# Altium PCB PCB_2xOPN2C-L MegaMod_2021-11-12.pcbdoc
Units mil, origin at the board's own origin, x right, y up, seen from the top; angles counter-clockwise.
Board outline 5110 x 4310 mil, 2 copper layers (Top Layer, Bottom Layer); 51 components, 62 nets, 234 pads, 27 vias.
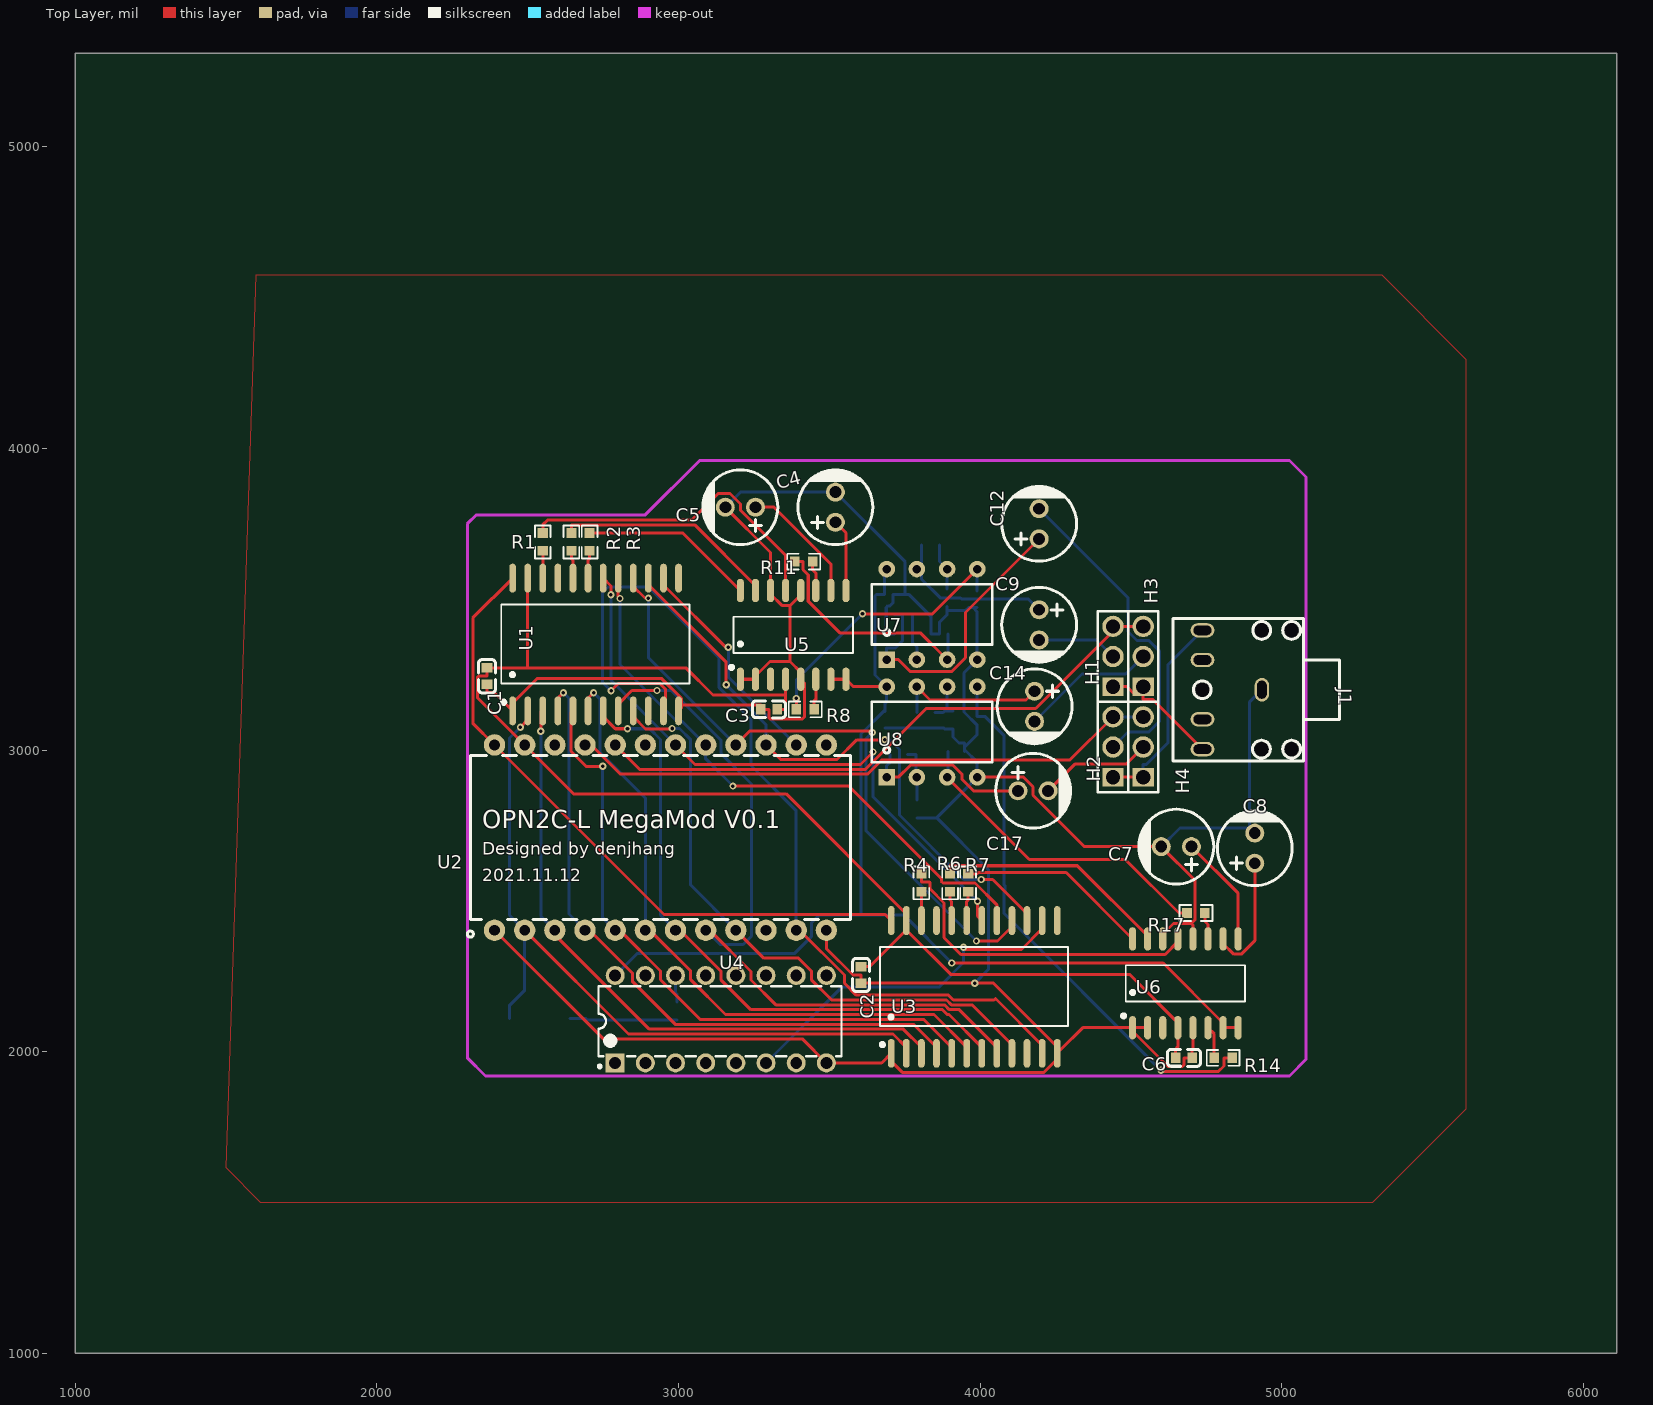
[diagram p0: Top Layer view]
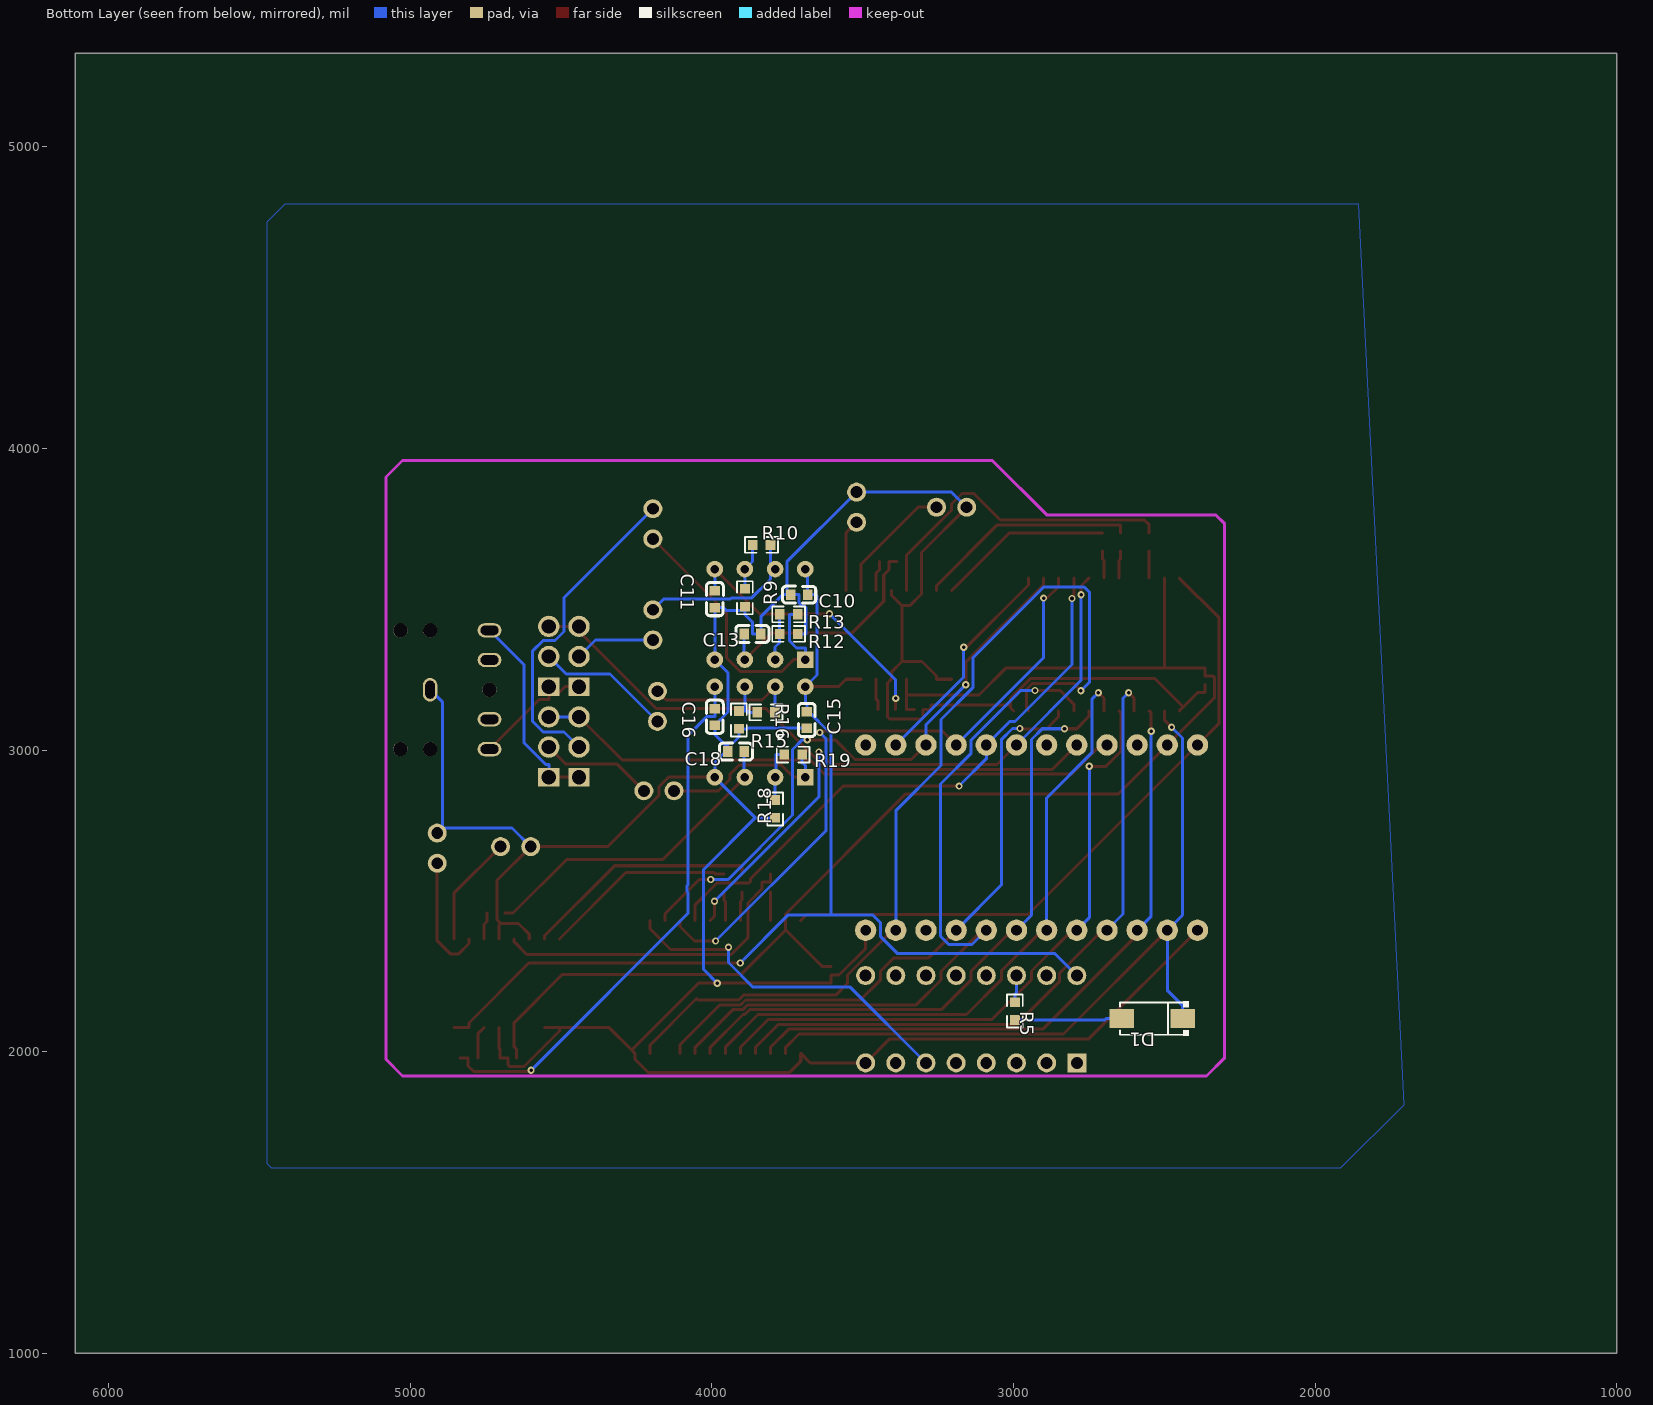
[diagram p1: Bottom Layer view, seen from below]

## Layer stack, top to bottom
Top Layer: signal copper (thickness not stored)
Dielectric: dielectric 12.6, FR-4, Dk 4.8
Bottom Layer: signal copper (thickness not stored)

## Board outline
6110,1000 1000,1000 1000,5310 6110,5310

## Components (designator, comment, footprint, x,y, rotation, side; value= is the part's Value field where it differs from the comment)
C1 "0.1u" C0603#1 2365,3245 r90 top
C2 "0.1u" C0603#1 3605,2255 r90 top
C3 "0.1u" C0603#1 3300,3135 r0 top
C4 "47u" CAP-TH_BD6.3-P2.50-D1.0-FD 3520,3805 r90 top
C5 "47u" CAP-TH_BD6.3-P2.50-D1.0-FD 3205,3805 r180 top
C6 "0.1u" C0603#1 4675,1980 r180 top
C7 "47u" CAP-TH_BD6.3-P2.50-D1.0-FD 4650,2680 r180 top
C8 "47u" CAP-TH_BD6.3-P2.50-D1.0-FD 4910,2675 r90 top
C9 "10uF" CAP-TH_BD6.3-P2.50-D1.0-FD 4195,3415 r270 top
C10 "0.1u" C0603#2 3710,3515 r0 bottom
C11 "1.5n" C0603#2 3990,3500 r90 bottom
C12 "10uF" CAP-TH_BD6.3-P2.50-D1.0-FD 4195,3750 r90 top
C13 "1.5n" C0603#2 3865,3385 r0 bottom
C14 "10uF" CAP-TH_BD6.3-P2.50-D1.0-FD 4180,3145 r270 top
C15 "0.1u" C0603#2 3685,3100 r270 bottom
C16 "1.5n" C0603#2 3990,3110 r90 bottom
C17 "10uF" CAP-TH_BD6.3-P2.50-D1.0-FD 4175,2865 r0 top
C18 "1.5n" C0603#2 3920,2995 r180 bottom
D1 "SS14" SMA_L4.4-W2.8-LS5.4-RD 2540,2110 r180 bottom
H1 "Header-Male-2.54_1x3" HDR-TH_3P-P2.54-V-M-1 4440,3310 r90 top
H2 "Header-Male-2.54_1x3" HDR-TH_3P-P2.54-V-M-1 4440,3010 r90 top
H3 "Header-Male-2.54_1x3" HDR-TH_3P-P2.54-V-M-1 4540,3310 r90 top
H4 "Header-Male-2.54_1x3" HDR-TH_3P-P2.54-V-M-1 4540,3010 r90 top
J1 "PJ-307C" AUDIO-TH_PJ307C 4835,3200 r270 top
R1 "10r" R0603#1 2550,3690 r90 top
R2 "10r" R0603#1 2645,3690 r90 top
R3 "10r" R0603#1 2705,3690 r90 top
R4 "10r" R0603#1 3805,2560 r90 top
R5 "1k" R0603#2 2995,2135 r90 bottom
R6 "10r" R0603#1 3900,2560 r90 top
R7 "10r" R0603#1 3960,2560 r90 top
R8 "7.5k" R0603#1 3420,3135 r180 top
R9 "10k" R0603#2 3890,3505 r270 bottom
R10 "4.7k" R0603#2 3835,3680 r0 bottom
R11 "7.5k" R0603#1 3415,3625 r180 top
R12 "10k" R0603#2 3745,3385 r180 bottom
R13 "4.7k" R0603#2 3745,3450 r0 bottom
R14 "7.5k" R0603#1 4805,1980 r0 top
R15 "10k" R0603#2 3910,3100 r270 bottom
R16 "4.7k" R0603#2 3820,3125 r0 bottom
R17 "7.5k" R0603#1 4715,2460 r180 top
R18 "10k" R0603#2 3790,2805 r270 bottom
R19 "4.7k" R0603#2 3730,2985 r0 bottom
U1 "YMF276-M" SOIC24-YMF276 2700,3370 r0 top
U2 "MegaGRRL IC-FM" DIP-24_L32.0-W13.8-P2.54-LS15.6-BL 2940,2710 r0 top
U3 "YMF276-M" SOIC24-YMF276 3955,2235 r0 top
U4 "MegaGRRL IC-DCSG" DIP-16_L20.4-W5.8-P2.54-LS7.6-BL 3139.96,2107.99 r0 top
U5 "μPD6376GS" SOIC16-UPD6376 3380,3395 r0 top
U6 "μPD6376GS" SOIC16-UPD6376 4680,2240 r0 top
U7 "SA5532P" DIP8 3840,3450 r0 top
U8 "SA5532P" DIP8 3840,3060 r0 top

## Footprints (in the part's own frame and the unit in brackets; to place one, negate y for a bottom-side part, rotate by r counter-clockwise, add the part's x,y. Pads: shape width x height; smd on the part's side, far side on the other; paste and mask are expansions set on the pad)
AUDIO-TH_PJ307C [mm]
  oval 2x1.2 hole 0.8 slot 1.5 at 0 deg: 1(0,2.5)
  oval 1.2x2 hole 0.8 slot 1.5 at 90 deg: 2(5,-2.5) 3(2.489,-2.5) 4(-2.511,-2.5) 5(-5,-2.5)
  round 1.2 hole 1.2 unplated: ""(-5,2.5) ""(-5,5) ""(0,-2.5) ""(5,2.5) ""(5,5)
  silkscreen extent -6.01,-4.99 5.99,9.03
C0603#1 [mm]
  rect 0.8x0.9 smd: 1(-0.7,0) 2(0.7,0)
  silkscreen extent -1.41,-0.71 1.39,0.72
C0603#2 [mm]
  rect 0.8x0.9 smd: 1(0.7,0) 2(-0.7,0)
  silkscreen extent -1.39,-0.72 1.41,0.71
CAP-TH_BD6.3-P2.50-D1.0-FD [mm]
  round 1.6 hole 1: 1(-1.27,0) 2(1.27,0)
  silkscreen extent -3.15,-3.15 3.17,3.15
DIP8 [mil]
  rect 55x55 hole 28: 1(-150,-150)
  round 55 hole 28: 2(-50,-150) 3(50,-150) 4(150,-150) 5(150,150) 6(50,150) 7(-50,150) 8(-150,150)
  silkscreen extent -200,-100 200,100
DIP-16_L20.4-W5.8-P2.54-LS7.6-BL [mm]
  rect 1.6x1.6 hole 1: 1(-8.89,-3.68)
  round 1.6 hole 1: 2(-6.35,-3.68) 3(-3.81,-3.68) 4(-1.27,-3.68) 5(1.27,-3.68) 6(3.81,-3.68) 7(6.35,-3.68) 8(8.89,-3.68) 9(8.89,3.68) 10(6.35,3.68) 11(3.81,3.68) 12(1.27,3.68) 13(-1.27,3.68) 14(-3.81,3.68) 15(-6.35,3.68) 16(-8.89,3.68)
  silkscreen extent -10.31,-4.1 10.16,2.77
DIP-24_L32.0-W13.8-P2.54-LS15.6-BL [mm]
  round 1.8 hole 0.9: 1(-13.97,-7.8) 2(-11.43,-7.8) 3(-8.89,-7.8) 4(-6.35,-7.8) 5(-3.81,-7.8) 6(-1.27,-7.8) 7(1.27,-7.8) 8(3.81,-7.8) 9(6.35,-7.8) 10(8.89,-7.8) 11(11.43,-7.8) 12(13.97,-7.8) 13(13.97,7.8) 14(11.43,7.8) 15(8.89,7.8) 16(6.35,7.8) 17(3.81,7.8) 18(1.27,7.8) 19(-1.27,7.8) 20(-3.81,7.8) 21(-6.35,7.8) 22(-8.89,7.8) 23(-11.43,7.8) 24(-13.97,7.8)
  silkscreen extent -16.26,-8.38 16,6.9
HDR-TH_3P-P2.54-V-M-1 [mm]
  rect 1.575x1.8 hole 1.2: 1(-2.54,0)
  round 1.8 hole 1.2: 2(0,0) 3(2.54,0)
  silkscreen extent -3.81,-1.27 3.81,1.27
R0603#1 [mil]
  rect 31.75x34.02 smd: 1(-29.66,0) 2(29.66,0)
  silkscreen extent -55,-26 55,26
R0603#2 [mil]
  rect 31.75x34.02 smd: 1(29.66,0) 2(-29.66,0)
  silkscreen extent -55,-26 55,26
SMA_L4.4-W2.8-LS5.4-RD [mm]
  rect 2.046x1.62 smd: 1(2.566,0) 2(-2.565,0)
  silkscreen extent -2.7,-1.44 3.08,1.44
SOIC16-UPD6376 [mil]
  oval 23.7x77.6 smd: 1(-175.12,-160.19) 2(-125.12,-160.19) 3(-75.12,-160.19) 4(-25.12,-160.19) 5(24.88,-160.19) 6(74.88,-160.19) 7(124.88,-160.19) 8(174.88,-160.19) 9(174.88,133.97) 10(124.88,133.97) 11(74.88,133.97) 12(24.88,133.97) 13(-25.12,133.97) 14(-75.12,133.97) 15(-125.12,133.97) 16(-175.12,133.97)
  silkscreen extent -211,-127 198,47
SOIC24-YMF276 [mil]
  oval 22.05x95.74 smd: 1(-250,-240) 2(-200,-240) 3(-150,-240) 4(-100,-240) 5(-50,-240) 6(0,-240) 7(50,-240) 8(100,-240) 9(150,-240) 10(200,-240) 11(250,-240) 12(300,-240) 13(300,200) 14(250,200) 15(200,200) 16(150,200) 17(100,200) 18(50,200) 19(0,200) 20(-50,200) 21(-100,200) 22(-150,200) 23(-200,200) 24(-250,200)
  silkscreen extent -288,-217 336,112

## Via types
v1: diameter 24.02, hole 12.01, Top Layer to Bottom Layer, 27 vias

## Nets (pads, with @x,y where several pads share a name; then routed paths per layer and width w, separated by ;. In a path a pad name is that pad's centre, name@x,y a point inside that pad or via, vN(x,y) a via of type N, cw(c..) or ccw(c..) an arc to the next point about the centre after c; other vN are vias at no path point)
/CS1: U1.14 U2.14 | length 740.2
  Top Layer w10: U1.14 2950,3547.01 3156.38,3340.63 v1(3165.03,3340.63)
  Bottom Layer w10: v1(3165.03,3340.63) 3165.03,3242.06 U2.14
/CS2: U3.14 U4.6 | length 1162.6
  Top Layer w10: v1(3944.36,2346.36) 3951.94,2338.78 4136.39,2338.78 4205,2407.39 U3.14
  Bottom Layer w10: U4.6 3541.2,2214.35 3863.01,2214.35 3944.36,2295.7 v1(3944.36,2346.36)
/IC: U1.11 U2.11 U3.11 | length 3129.4
  Top Layer w10: v1(2776.36,3196.43) 2800.37,3220.44 2937.99,3220.44 2956.67,3201.76 2956.67,3136.67 U1.11 ; U2.11 3401.03,2402.91 3549.67,2254.27 3549.67,2227.43 3589.34,2187.76 3894.54,2187.76 3910.63,2171.67 4045.95,2171.67 4050.66,2176.38 4205,2022.04 U3.11
  Bottom Layer w10: v1(2776.36,3196.43) 2748.22,3224.57 2748.22,3523.24 2765.34,3540.36 2899.46,3540.36 3134.76,3305.06 3134.76,3206.7 3240,3101.46 3240,2948.91 3390,2798.91 U2.11
/RD: U1.16 U2.16 U3.16 | length 2183.2
  Top Layer w10: U1.16 2850,3542.24 2888.45,3503.79 v1(2900,3503.79) ; U2.16 3236.55,3063.64 3636.4,3063.64 v1(3641.93,3058.11) ; v1(3987.28,2367) 4057.05,2367 4105,2414.95 U3.16
  Bottom Layer w10: v1(2900,3503.79) 2900,3307.09 U2.16 ; v1(3641.93,3058.11) 3620.87,3037.05 3620.87,2733.41 v1(3987.28,2367)
/WR: U1.15 U2.15 U3.15 | length 2015
  Top Layer w10: U1.15 2900,3549.04 3157.84,3291.2 v1(3157.84,3216.25) ; U2.15 3338.56,2968.53 3525.31,2968.53 3590.9,3034.12 v1(3683.67,3034.12) ; v1(4003.6,2571.17) 4040.95,2571.17 4155,2457.12 U3.15
  Bottom Layer w10: v1(3157.84,3216.25) 3290,3084.09 U2.15 ; v1(3683.67,3034.12) 3699.76,3034.12 3732.2,3001.68 3732.2,2784.61 3945.64,2571.17 v1(4003.6,2571.17)
A0: U1.17 U2.17 U3.17 | length 1951.9
  Top Layer w10: U1.17 2800,3508.3 v1(2806.02,3502.28) ; v1(3180.16,2880.74) 3564.23,2880.74 3870.88,2574.09 3870.88,2565.63 3876.74,2559.77 3982.36,2559.77 4055,2487.13 U3.17
  Bottom Layer w10: v1(2806.02,3502.28) 2806.02,3283.68 2994.98,3094.72 3012.37,3094.72 U2.17 3090,2970.9 v1(3180.16,2880.74)
A1: U1.18 U2.18 U3.18 | length 2059.3
  Top Layer w10: U1.18 2775.83,3544.17 v1(2775.83,3514.7) ; U2.18 3054.65,2952.44 3603.21,2952.44 v1(3644.75,2993.98) ; v1(3990.74,2498.93) 3990.74,2449.26 U3.18
  Bottom Layer w10: v1(2775.83,3514.7) 2775.83,3231.26 U2.18 ; v1(3644.75,2993.98) 3644.76,2844.91 v1(3990.74,2498.93)
A.VCC: C10.2 C15.2 U4.16 U5.7 U5.8 U6.7 U6.8 U7.8 U8.8 | length 3769.6
  Top Layer w10: U5.7 U5.8 3579.68,3210 U8.8 ; v1(3905.76,2294.31) 4606.11,2294.31 4804.88,2095.54 U6.7 U6.8
  Bottom Layer w10: U4.16 2862.21,2325.12 3383.71,2325.12 3440,2381.41 3440,2426.7 3467.16,2453.86 3604.78,2453.86 ; C15.2 C15.2@3685,3133.74 ; U7.8 3682.44,3592.44 C10.2 3655.62,3515 3651.42,3510.8 3651.42,3248.58 U8.8 3690,3159.38 3685,3154.38 C15.2@3685,3133.74 ; v1(3905.76,2294.31) 3746.21,2453.86 3604.78,2453.86 ; 3604.78,2453.86 3604.78,3053.6 3684.92,3133.74 C15.2@3685,3133.74
BCO1: R3.2 U5.16 | length 578.9
  Top Layer w10: R3.2 3014.2,3719.66 U5.16
BCO2: R7.2 U6.16 | length 638
  Top Layer w10: R7.2 3988.08,2589.66 3992.67,2594.25 4284.61,2594.25 U6.16
C4_1: C4.1 U5.9 | length 240.5
  Top Layer w10: C4.1 3554.88,3720.12 U5.9
C5_1: C5.1 U5.10 | length 415.7
  Top Layer w10: C5.1 3316.7,3805 3504.88,3616.82 U5.10
C9_1: C9.1 R10.2 U7.7 | length 579.9
  Bottom Layer w10: U7.7 3805.34,3615.34 3805.34,3628.42 ; R10.2 3805.34,3628.42 ; C9.1 4159.27,3500.73 3937.82,3500.73 3935.21,3503.34 3868.61,3503.34 3805.34,3566.61 3805.34,3628.42
C9_2: C9.2 H1.2 | length 267.8
  Bottom Layer w10: C9.2 4385,3365 H1.2
C12_1: C12.1 R13.2 U7.1 | length 1006.6
  Top Layer w10: U7.1 3728.57,3300 3767.86,3260.71 3905.68,3260.71 3951.3,3306.33 3951.3,3456.3 C12.1
  Bottom Layer w10: U7.1 3690,3338.57 3718.93,3338.57 3742.29,3361.93 3742.29,3450 R13.2
C12_2: C12.2 H2.2 | length 1081.8
  Bottom Layer w10: C12.2 4490.01,3504.99 4490.01,3393.24 4519.76,3363.49 4558.85,3363.49 4593.49,3328.85 4593.49,3094.76 4558.73,3060 4490,3060 H2.2
D0: D1.1 U1.2 U2.2 U3.2 | length 2532.4
  Top Layer w10: v1(2475.87,3076.02) 2500,3100.15 U1.2 ; U2.2 2833.87,2059.04 3711,2059.04 3755,2015.04 U3.2
  Bottom Layer w10: D1.1 2439,2152.96 2490,2203.96 U2.2 2440,2452.91 2440,3040.15 v1(2475.87,3076.02)
D1: U1.3 U2.3 U3.3 | length 2153.4
  Top Layer w10: v1(2543.49,3062.33) 2543.49,3123.49 U1.3 ; U2.3 2590,2388.13 2903,2075.13 3744.92,2075.13 3805,2015.05 U3.3
  Bottom Layer w10: v1(2543.49,3062.33) 2543.49,2449.42 U2.3
D2: U1.4 U2.4 U3.4 | length 2246.2
  Top Layer w10: U1.4 2600,3171.65 v1(2618.35,3190) ; U2.4 2704.8,2402.91 2846.8,2260.91 2846.8,2233.35 2988.93,2091.22 3778.82,2091.22 3855,2015.04 U3.4
  Bottom Layer w10: v1(2618.35,3190) 2636.51,3171.84 2636.51,2456.4 U2.4
D3: U1.5 U2.5 U3.5 | length 2135.3
  Top Layer w10: U1.5 2643.49,3123.49 2643.49,2996.22 2693.35,2946.36 v1(2748.47,2946.36) ; U2.5 2804.79,2402.91 2939.98,2267.72 2939.98,2239 3071.67,2107.31 3812.73,2107.31 3905,2015.04 U3.5
  Bottom Layer w10: v1(2748.47,2946.36) 2748.47,2444.44 U2.5
D4: U1.6 U2.6 U3.6 | length 2188.3
  Top Layer w10: U1.6 2700,3171.65 v1(2718.35,3190) ; U2.6 2904.77,2402.91 3039.98,2267.7 3039.98,2238.99 3155.57,2123.4 3846.64,2123.4 3955,2015.04 U3.6
  Bottom Layer w10: v1(2718.35,3190) 2740.01,3168.34 2740.01,2991.12 2890,2841.13 U2.6
D5: U1.7 U2.7 U3.7 | length 2105.9
  Top Layer w10: U1.7 2750,3111.15 2790.42,3070.73 v1(2830.69,3070.73) ; U2.7 3004.57,2402.91 3139.98,2267.5 3139.98,2238.89 3239.38,2139.49 3874.53,2139.49 3890.62,2123.4 3896.64,2123.4 4005,2015.04 U3.7
  Bottom Layer w10: v1(2830.69,3070.73) 2904.62,3070.73 2940,3035.35 2940,2452.91 U2.7
D6: U1.8 U2.8 U3.8 | length 2486.5
  Top Layer w10: U1.8 2800,3152.23 2845.13,3197.36 v1(2928.42,3197.36) ; U2.8 3102.95,2402.91 3239.98,2265.88 3239.98,2238.09 3322.49,2155.58 3881.2,2155.58 3897.29,2139.49 3930.55,2139.49 4055,2015.04 U3.8
  Bottom Layer w10: v1(2928.42,3197.36) 2976.08,3197.36 3140,3033.44 3140,2989.86 3241.93,2887.93 3241.93,2383.19 3214.01,2355.27 3137.64,2355.27 U2.8
D7: U1.9 U2.9 U3.9 | length 2052.6
  Top Layer w10: U1.9 2850,3110.98 2890.74,3070.24 2977.51,3070.24 v1(2978.64,3071.37) ; U2.9 3282.72,2310.19 3397.65,2310.19 3439.98,2267.86 3439.98,2239.07 3507.38,2171.67 3887.87,2171.67 3903.96,2155.58 3972.5,2155.58 4105,2023.08 U3.9
  Bottom Layer w10: v1(2978.64,3071.37) 3003.02,3071.37 3040,3034.39 3040,2552.91 U2.9
DO1: R2.2 U5.15 | length 736.4
  Top Layer w10: R2.2 2645,3746.6 3053.34,3746.6 3254.88,3545.06 U5.15
DO2: R6.2 U6.15 | length 788
  Top Layer w10: R6.2 3900,2616.6 4321.89,2616.6 4554.88,2383.61 U6.15
GND: C1.1 C2.1 C3.1 C4.2 C5.2 C6.1 C7.2 C8.2 C10.1 C11.2 C13.2 C15.1 C16.2 C18.2 J1.1 R9.1 R12.1 R15.1 R18.1 U1.1 U1.12 U2.1 U2.12 U3.1 U3.12 U4.8 U5.1 U5.2 U5.5 U5.12 U5.14 U6.1 U6.2 U6.5 U6.12 U6.14 U7.4 U8.4 | length 11516.4
  Top Layer w10: C1.1 2365,3190.62 2389.38,3190.62 2437.21,3142.79 ; U2.1 2749.97,2042.94 3410.13,2042.94 U4.8 3673.11,1963.11 U3.1 3705,1968.73 3741.65,1932.08 4210.96,1932.08 4255,1976.12 U3.12 U3.12@4265.6,2005.6 ; U1.1 2437.21,3142.79 ; U1.12 3009.7,3139.7 U1.12@3009.7,3149.4 ; C5.2 3304.88,3655.12 U5.14 3304.88,3517.71 3343.91,3478.68 3369.32,3478.68 ; U5.1 U5.2 3254.88,3245.85 3302.9,3293.87 3369.32,3293.87 ; U5.12 3404.88,3514.24 3369.32,3478.68 ; U2.12 3490,2342.44 3578.18,2254.26 3605,2254.26 C2.1 v1(3981.72,2227.44) 4043.76,2227.44 U3.12@4265.6,2005.6 ; U8.4 4143.36,2910 4175,2878.36 4175,2850.39 4345.39,2680 C7.2 4712.3,2567.7 4712.3,2438.42 4699.08,2425.2 ; U6.2 U6.1 ; U6.14 4604.88,2389.44 4640.64,2425.2 4699.08,2425.2 ; U6.5 4704.88,2011.11 4702.56,2008.79 C6.1 4675.74,1980 4675.74,1957.18 4669.76,1951.2 4622.27,1951.2 4504.88,2068.59 U6.1 ; U6.12 4704.88,2419.4 4699.08,2425.2 ; 2437.21,3142.79 2530.95,3236.53 2944.66,3236.53 3009.7,3171.49 U1.12@3009.7,3149.4 ; U1.12@3009.7,3149.4 3272.44,3149.4 C3.1 3299.26,3135 3299.26,3108.18 3303.68,3103.76 3410.9,3103.76 3417.3,3110.16 3417.3,3222.38 U5.5 3404.88,3258.31 3369.32,3293.87 ; 3369.32,3293.87 3369.32,3478.68 ; U3.12@4265.6,2005.6 4339.8,2079.8 U6.1
  Bottom Layer w10: C5.2 3205,3855 C4.2 3750.97,3624.03 C10.1@3750.97,3515 ; C15.1 3879.82,3072.44 3881.92,3070.34 R15.1 3910,3043.4 3929.61,3023.79 3947.56,3023.79 C18.2@3947.56,3009.4 ; R12.1 3688.4,3385 3688.4,3472.73 3693.76,3478.09 3700.65,3478.09 3710.74,3488.18 3710.74,3515 3724.15,3515 C10.1 C10.1@3750.97,3515 ; R18.1 3855.34,2775.34 ; R9.1 R9.1@3890,3461.87 ; C18.2 C18.2@3947.56,3002.2 ; v1(3981.72,2227.44) 4026.68,2272.4 4026.68,2604 3855.34,2775.34 ; C11.2 C11.2@3975.61,3472.44 ; C7.2 4661.79,2741.79 C8.2@4893.21,2741.79 ; C8.2 C8.2@4893.21,2741.79 ; J1.1 4893.21,3159.78 C8.2@4893.21,2741.79 ; C10.1@3750.97,3515 3764.38,3515 3837.44,3441.94 C13.2 3864.26,3385 3864.26,3422.66 3890,3448.4 R9.1@3890,3461.87 ; 3855.34,2775.34 U8.4 3990,2959.76 C18.2@3947.56,3002.2 ; R9.1@3890,3461.87 3950.64,3461.87 3961.21,3472.44 C11.2@3975.61,3472.44 ; C18.2@3947.56,3002.2 C18.2@3947.56,3009.4 ; C18.2@3947.56,3009.4 3990,3051.84 C16.2 3946.26,3126.18 3946.26,3256.26 U7.4 3990,3458.05 C11.2@3975.61,3472.44
H3_2: C14.2 H3.2 | length 449.1
  Bottom Layer w10: C14.2 4337.09,3252.09 4482.09,3252.09 H3.2
H4_2: C17.2 H4.2 | length 375.1
  Top Layer w10: C17.2 4313.27,2953.27 4483.27,2953.27 H4.2
IN.L: H2.3 H4.3 U2.21 | length 1968.7
  Top Layer w10: U2.21 2710.39,3017.09 2807.22,2920.26 3626.44,2920.26 3673.05,2966.87 4296.87,2966.87 H2.3
  Bottom Layer w10: H2.3 H4.3
IN.R: H1.3 H3.3 U2.20 | length 1989
  Top Layer w10: U2.20 2870.74,2936.35 3619.76,2936.35 3820.99,3137.58 4183.54,3137.58 4440,3394.04 H1.3 H3.3
LO1: R11.1 U5.11 | length 100.3
  Top Layer w10: R11.1 3444.66,3596.92 3454.88,3586.7 U5.11
LO2: R17.1 U6.11 | length 90.3
  Top Layer w10: R17.1 4744.66,2431.92 4754.88,2421.7 U6.11
LRO1: R1.2 U5.13 | length 1088.4
  Top Layer w10: R1.2 2550,3746.6 2566.1,3762.7 3043.66,3762.7 3131.58,3850.62 3170.23,3850.62 3205,3815.85 3205,3794.58 3354.88,3644.7 U5.13
LRO2: R4.2 U6.13 | length 1083.1
  Top Layer w10: R4.2 3805,2562.71 3831.95,2562.71 3833.09,2561.57 3833.09,2539.94 3880,2493.03 3880,2378.07 3935.38,2322.69 4613.09,2322.69 4654.88,2364.48 U6.13
MCLK: U1.24 U2.24 U3.24 | length 2193.3
  Top Layer w10: U1.24 2318.21,3438.21 2318.21,3088.88 U2.24 2952.1,2454.99 3685.01,2454.99 U3.24
OUT.L: H2.1 H4.1 J1.5 | length 674.4
  Top Layer w10: H2.1 H4.1
  Bottom Layer w10: H4.1 4540,2952.07 4550.52,2952.07 4621.7,3023.25 4621.7,3281.97 J1.5
OUT.R: H1.1 H3.1 J1.2 | length 415.6
  Top Layer w10: H1.1 4486.5,3210 4507.53,3188.97 H3.1@4540,3188.97 ; H3.1 H3.1@4540,3188.97 ; J1.2 4571.8,3167.93 4540,3167.93 H3.1@4540,3188.97
R1_1: R1.1 U1.22 | length 90.3
  Top Layer w10: U1.22 R1.1
R2_1: R2.1 U1.20 | length 92.4
  Top Layer w10: R2.1 2645,3633.4 2650,3628.4 U1.20
R3_1: R3.1 U1.19 | length 92.4
  Top Layer w10: U1.19 2700,3628.4 2705,3633.4 R3.1
R5_2: D1.2 R5.2 | length 355.9
  Bottom Layer w10: D1.2 2692.36,2110 2697.02,2105.34 R5.2
R8_2: C11.1 R8.2 U7.5 | length 921.7
  Top Layer w10: R8.2 v1(3390.34,3171.34) ; v1(3609.89,3451.82) 3841.82,3451.82 U7.5
  Bottom Layer w10: v1(3390.34,3171.34) 3390.34,3232.27 v1(3609.89,3451.82) ; C11.1 U7.5
R10_1: R9.2 R10.1 U7.6 | length 155.8
  Bottom Layer w10: R10.1 3864.66,3625.34 U7.6 R9.2
R11_2: C13.1 R11.2 U7.3 | length 792.2
  Top Layer w10: R11.2 3412.29,3625 3412.29,3598.05 3429.88,3580.46 3429.88,3493.23 3534.53,3388.58 3801.42,3388.58 U7.3
  Bottom Layer w10: U7.3 3892.56,3302.56 C13.1
R13_1: R12.2 R13.1 U7.2 | length 156.4
  Bottom Layer w10: R13.1 R12.2 3774.66,3356.92 3790,3341.58 U7.2
RO1: R8.1 U5.6 | length 102
  Top Layer w10: R8.1 3449.66,3163.08 3454.88,3168.3 U5.6
RO2: R14.1 U6.6 | length 108.3
  Top Layer w10: U6.6 4775.34,2059.34 R14.1
S$18864: 
U3_19: R7.1 U3.19 | length 97.4
  Top Layer w10: U3.19 3955,2498.4 3960,2503.4 R7.1
U3_20: R6.1 U3.20 | length 97.4
  Top Layer w10: R6.1 3900,2503.4 3905,2498.4 U3.20
U3_22: R4.1 U3.22 | length 95.3
  Top Layer w10: U3.22 R4.1
U4_14: R5.1 U4.14 | length 90.3
  Bottom Layer w10: U4.14 2989.96,2196.64 2995,2191.6 R5.1
U6_9: C7.1 U6.9 | length 370.2
  Top Layer w10: C7.1 4854.88,2525.12 U6.9
U6_10: C8.1 U6.10 | length 409.7
  Top Layer w10: U6.10 4804.88,2359.24 4840.41,2323.71 4865.25,2323.71 4910,2368.46 C8.1
U8_1: C17.1 R19.2 U8.1 | length 577.6
  Top Layer w10: U8.1 3728.57,2910 3769.34,2950.77 3908.63,2950.77 3940,2919.4 3940,2902.72 3977.72,2865 C17.1
  Bottom Layer w10: U8.1 3690,2948.57 3698.35,2956.92 3700.34,2956.92 R19.2
U8_2: R18.2 R19.1 U8.2 | length 178.7
  Bottom Layer w10: R19.1 3786.6,2985 3786.6,2913.4 U8.2 R18.2
U8_3: C18.1 R17.2 U8.3 | length 1067.7
  Top Layer w10: U8.3 4162.58,2637.42 4480.98,2637.42 4658.4,2460 R17.2
  Bottom Layer w10: U8.3 3892.44,2912.44 C18.1
U8_5: C16.1 R14.2 U8.5 | length 1814.1
  Top Layer w10: v1(4598.67,1939.13) 4602.69,1935.11 4789.77,1935.11 4807.71,1953.05 4807.71,1980 R14.2
  Bottom Layer w10: U8.5 C16.1 3990,3110.74 4016.82,3110.74 4078.11,3049.45 4078.11,2554.62 4082.15,2550.58 4082.15,2531.44 4078.11,2527.4 4078.11,2459.69 v1(4598.67,1939.13)
U8_6: R15.2 R16.1 U8.6 | length 145.1
  Bottom Layer w10: R16.1 3877.26,3125 3881.92,3129.66 R15.2@3895.96,3129.66 ; U8.6 3890,3135.62 R15.2@3895.96,3129.66 ; R15.2 R15.2@3895.96,3129.66
U8_7: C14.1 R16.2 U8.7 | length 505.1
  Top Layer w10: U8.7 3833.71,3166.29 4151.29,3166.29 C14.1
  Bottom Layer w10: U8.7 3790.34,3209.66 R16.2
VCC: C1.2 C2.2 C3.2 C6.2 U1.23 U2.23 U3.23 U5.4 U6.4 | length 4696.5
  Top Layer w10: U1.23 2500,3272.56 ; C3.2 3354.38,3135 3354.38,3182.68 ; U5.4 3354.38,3234.3 3354.38,3182.68 ; C2.2 3633.79,2282.56 U3.23@3755,2403.77 ; C6.2 4647.44,2008.79 4654.88,2016.23 U6.4 4654.88,2096.64 4494.61,2256.91 3901.86,2256.91 U3.23@3755,2403.77 ; 2500,3272.56 3024.22,3272.56 3114.1,3182.68 3354.38,3182.68 ; 2500,3272.56 C1.2 2365,3245.74 2338.18,3245.74 2334.3,3241.86 2334.3,3172.79 U2.23 2651.96,2855.13 3356.83,2855.13 3755,2456.96 U3.23 U3.23@3755,2403.77
pads on no net: J1. J1.3 J1.4 U1.10 U1.13 U1.21 U2.10 U2.13 U2.19 U2.22 U3.10 U3.13 U3.21 U4.1 U4.2 U4.3 U4.4 U4.5 U4.7 U4.9 U4.10 U4.11 U4.12 U4.13 U4.15 U5.3 U6.3

## Polygon pours and split planes (outlines as drawn)
GND on Bottom Layer (solid): 1855,4810 5415,4810 5475,4750 5475,1630 5460,1615 1915,1615 1705,1825
GND on Top Layer (solid): 1600,4575 5330,4575 5610,4295 5610,1810 5300,1500 1615,1500 1500,1615

## Silkscreen, mask and mechanical layers (free items; w line width, h text height)
Top Overlay:
  text "OPN2C-L MegaMod V0.1" at 2350,2740.47 h59.05
  text "Designed by denjhang" at 2350,2653.84 h40.63
  text "2021.11.12" at 2350,2564.68 h40.63